# Altium PCB PCB1.PcbDoc
Units mil, origin at the board's own origin, x right, y up, seen from the top; angles counter-clockwise.
Board outline 4140 x 3025 mil, 2 copper layers (Top Layer, Bottom Layer); 30 components, 17 nets, 70 pads, 5 vias.
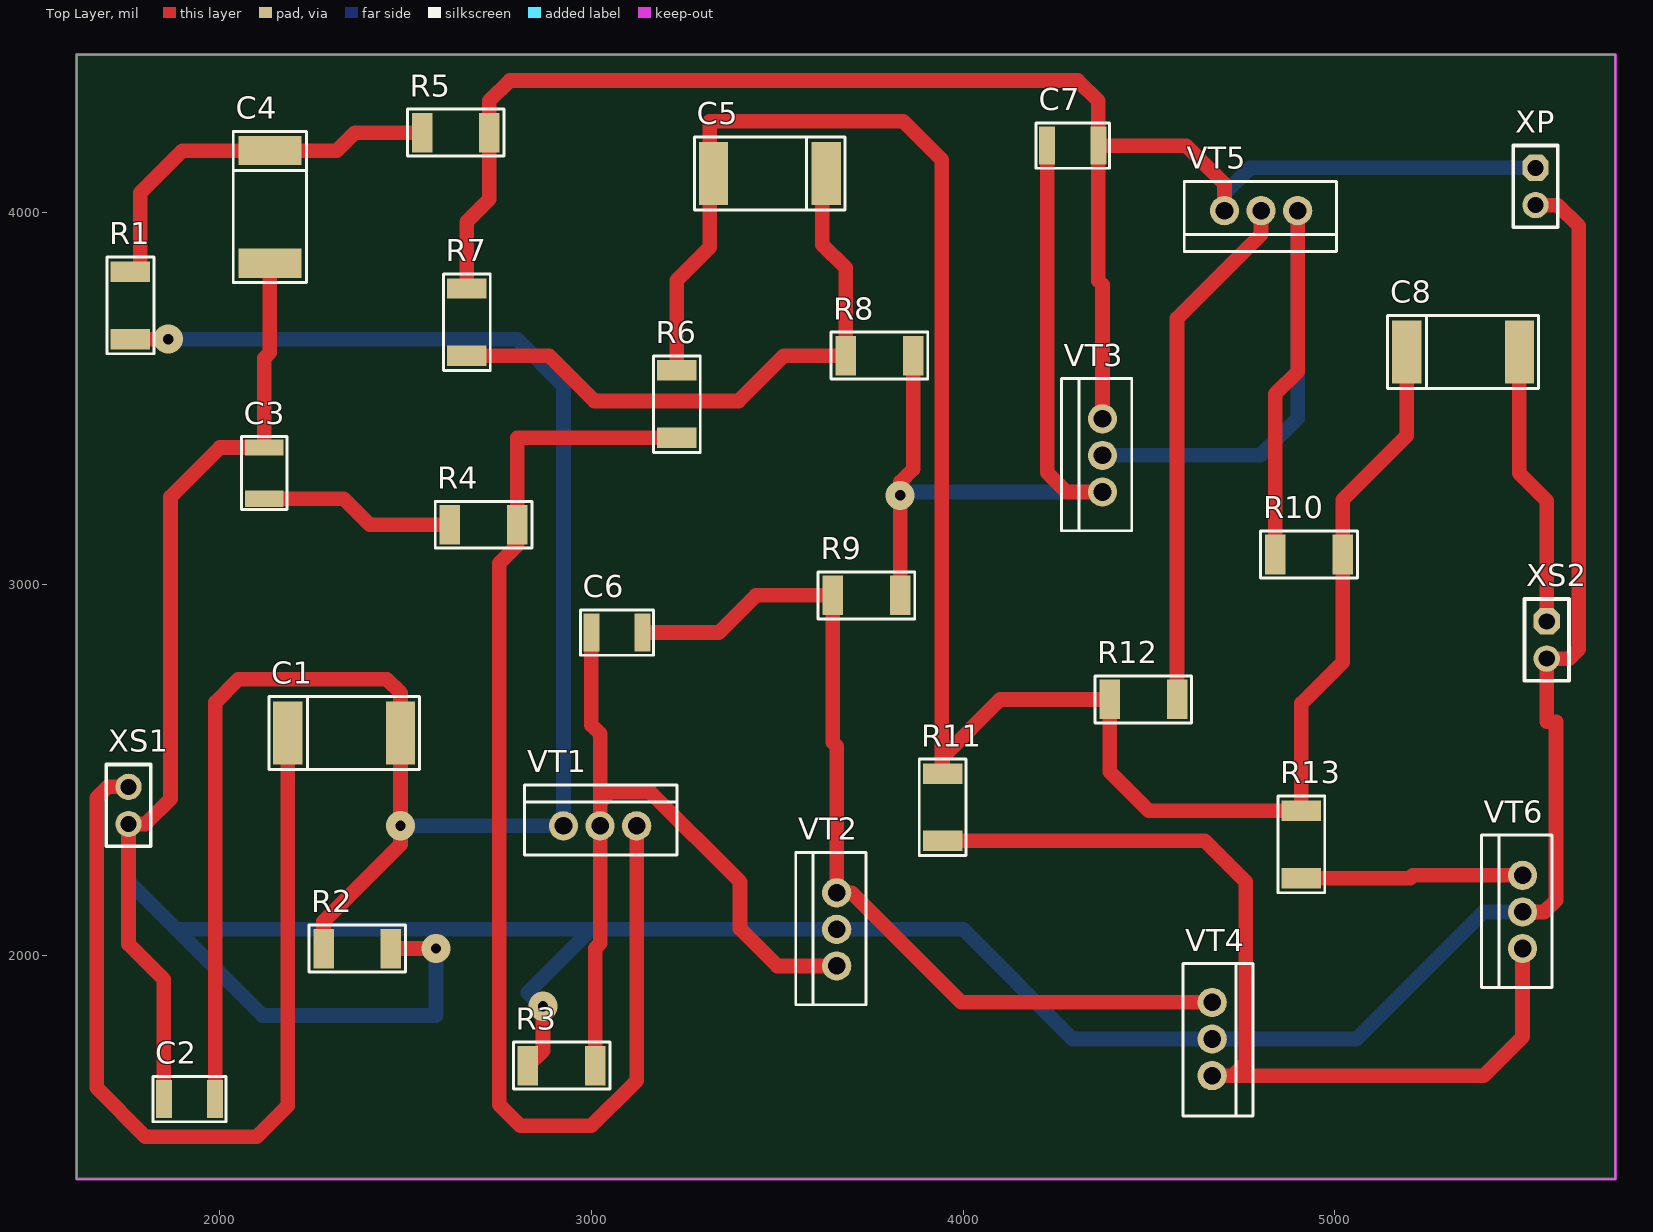
[diagram p0: Top Layer view]
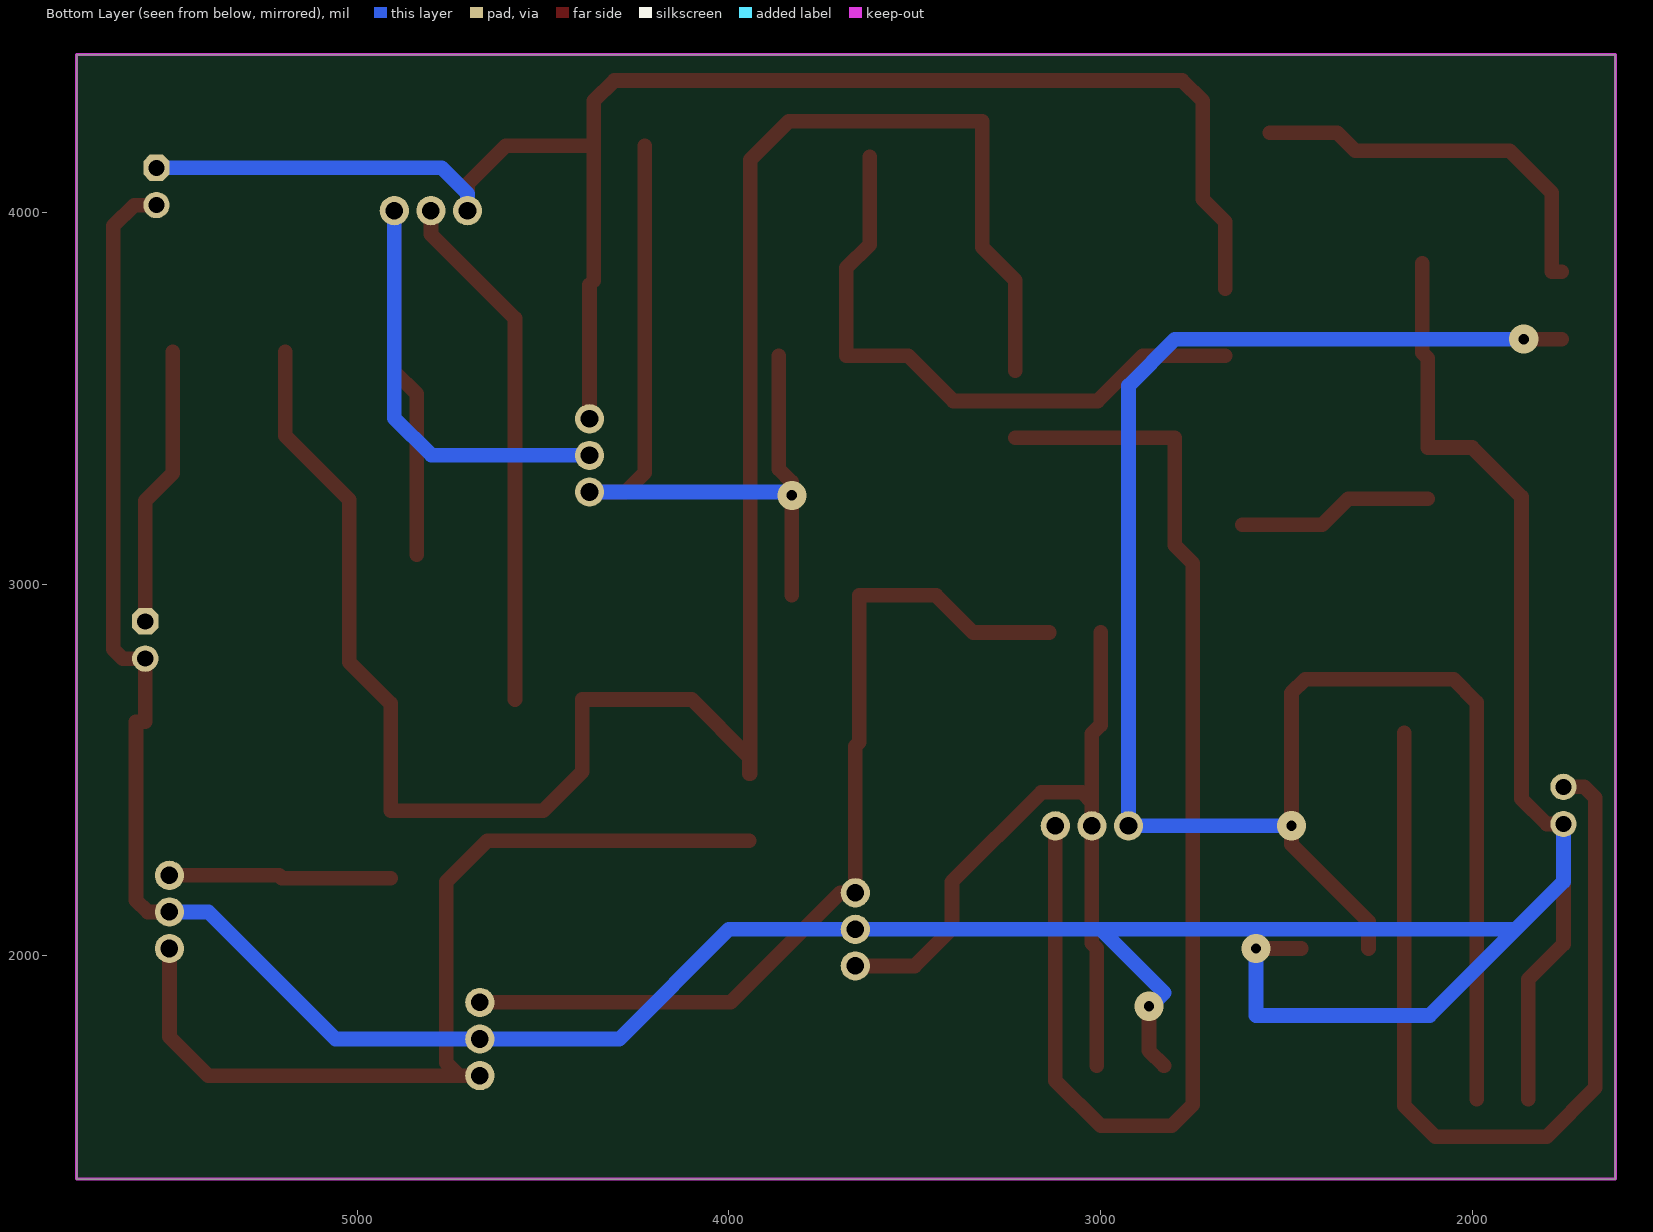
[diagram p1: Bottom Layer view, seen from below]
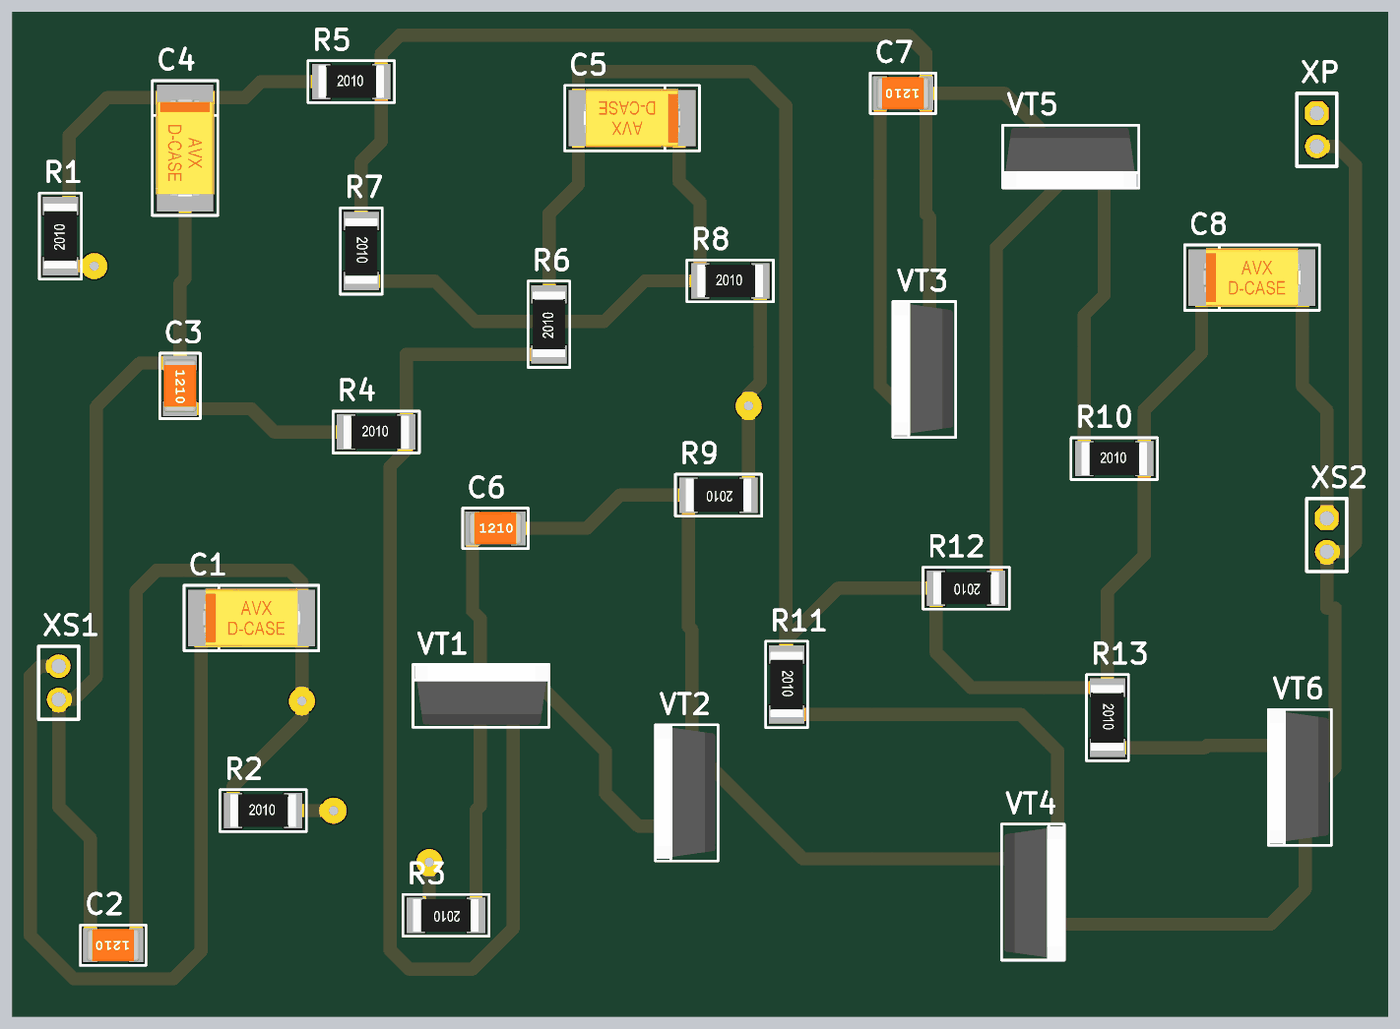
[diagram p2: 3D render of the assembled board from above, using the file's embedded part models]

## Layer stack, top to bottom
Top Solder: solder mask 0.4, Solder Resist, Dk 3.5
Top Layer: signal copper 39.3701
Dielectric 1: dielectric 12.6, FR-4, Dk 4.8
Bottom Layer: signal copper 39.3701
Bottom Solder: solder mask 0.4, Solder Resist, Dk 3.5

## Board outline
1615,1400 1615,4425 5690,4425 5755,4425 5755,1400

## Design rules (kind name [scope] priority, off if disabled: settings)
Clearance Clearance_1 [All] p1: gap=30 ignorepadtopadclearanceinfootprint=FALSE except(0: Arc-Hole Track-Hole SMDPad-Hole THPad-Hole Via-Hole Fill-Hole Poly-Hole Region-Hole Text-Hole)
PolygonConnect [All] p1: connectstyle=Relief reliefconductorwidth=10 reliefentries=4 polygonreliefangle="90 Angle" airgapwidth=10
RoutingVias [All] p1: holewidth=28 width=50 viastyle="Through Hole" minholewidth=28 minwidth=50 maxholewidth=28 maxwidth=50
SolderMaskExpansion [All] p1: expansion=4
Width [All] p1: maxlimit=78.74 minlimit=39.37 preferedwidth=39.37 minimp=50.000000 maximp=50.000000 favimp=50.000000
30 further rules are at their usual default settings.

## Components (designator, comment, footprint, x,y, rotation, side; value= is the part's Value field where it differs from the comment)
C1 "5u" TANTAL_D 2335,2600 r0 top
C2 "1n" CH1210C 1918.9,1615 r180 top
C3 "20u" CH1210C 2120,3298.9 r270 top
C4 "5u" TANTAL_D 2135,4015 r270 top
C5 "20u" TANTAL_D 3480,4105 r180 top
C6 "20" CH1210C 3068.9,2870 r0 top
C7 "200" CH1210C 4295,4180 r180 top
C8 "5u" TANTAL_D 5345,3625 r0 top
R1 "33k" CH2010R 1760,3750 r90 top
R2 "33k" CH2010R 2370,2020 r0 top
R3 "33k" CH2010R 2920,1705 r180 top
R4 "470" CH2010R 2710,3160 r0 top
R5 "18k" CH2010R 2635,4215 r0 top
R6 "3.3k" CH2010R 3230,3484.45 r90 top
R7 "390" CH2010R 2665,3705 r270 top
R8 "2.7k" CH2010R 3775,3615 r0 top
R9 "560" CH2010R 3740,2970 r180 top
R10 "100" CH2010R 4930.55,3080 r0 top
R11 "100" CH2010R 3945,2400 r270 top
R12 "0.22" CH2010R 4485,2690 r180 top
R13 "0.22" CH2010R 4910,2300 r270 top
VT1 "*" TO220_132 3023.43,2350 r0 top
VT2 "*" TO220_132 3660,2071.58 r90 top
VT3 "*" TO220_132 4375,3346.57 r90 top
VT4 "*" TO220_132 4670,1776.57 r270 top
VT5 "*" TO220_132 4801.57,4005 r180 top
VT6 "*" TO220_132 5505,2118.43 r90 top
XP "*" "CON: PBS-2"#1 5540,4070 r270 top
XS1 "*" "CON: PBS-2"#2 1755,2405 r270 top
XS2 "*" "CON: PBS-2"#1 5570,2850 r270 top

## Footprints (in the part's own frame and the unit in brackets; to place one, negate y for a bottom-side part, rotate by r counter-clockwise, add the part's x,y. Pads: shape width x height; smd on the part's side, far side on the other; paste and mask are expansions set on the pad)
CH1210C [mm] "Non polar chip capacitor, size 1210"
  rect 1.1x2.6 smd: 1(-1.75,0) 2(1.75,0)
  silkscreen extent -2.5,-1.55 2.5,1.55, body extent -2,-1.24 2,1.24, height 1.7
CH2010R [mm]
  rect 1.4x2.7 smd: 1(-2.3,0) 2(2.3,0)
  silkscreen extent -3.3,-1.6 3.3,1.6, body extent -2.5,-1.25 2.5,1.25, height 0.6
"CON: PBS-2"#1 [mm] "PBS-2"
  oct 1.8x1.8 hole 1.1: 1(-1.27,0)
  round 1.8 hole 1.1: 2(1.27,0)
  silkscreen extent -2.79,-1.52 2.79,1.52
"CON: PBS-2"#2 [mm] "PBS-2"
  round 1.8 hole 1.1: 1(-1.27,0) 2(1.27,0)
  silkscreen extent -2.79,-1.52 2.79,1.52
TANTAL_D [mm]
  rect 2x4.3 smd: 1(-3.85,0) 2(3.85,0)
  round 0.5 on Mech1: ""(-3.1,1.8)
  silkscreen extent -5.15,-2.5 5.15,2.5, body extent -3.7,-2.22 3.7,2.23, height 3.01
TO220_132 [mm] "Generic TO-220 case, stay variant"
  round 2 hole 1.2: 1(-2.5,0) 2(2.5,0) 3(0,0)
  silkscreen extent -5.15,-2 5.25,2.8, body extent -5,-1.8 5.2,2.7, height 22.06

## Part data
C1 C4 C5 C8: library part TantalCap
C2 C3 C6 C7: library part Capacitor
R1 R2 R3 R4 R5 R6 R7 R8 R9 R10 R11 R12 R13: library part Resistor
VT1 VT4 VT6: library part PNP, "Bipolar"
VT2 VT3 VT5: library part NPN, "Bipolar"
XP XS1 XS2: library part 2-Connector

## Via types
v1: diameter 78.74, hole 28, Top Layer to Bottom Layer, 5 vias

## Nets (pads, with @x,y where several pads share a name; then routed paths per layer and width w, separated by ;. In a path a pad name is that pad's centre, name@x,y a point inside that pad or via, vN(x,y) a via of type N, cw(c..) or ccw(c..) an arc to the next point about the centre after c; other vN are vias at no path point)
GND: C2.2 C3.1 C4.2 R2.2 R3.2 VT2.3 VT4.3 VT6.3 XP.2 XS1.2 XS2.2 | length 10485.9
  Top Layer w39.37: C2.2 1850,1937 1755,2032 XS1.2 1800,2355 1868,2423 1868,3235.8 2000,3367.8 C3.1 2120,3608 2135,3623 C4.2 ; R2.2 v1(2582,2020) ; R3.2 2870,1745.55 v1(2870,1865) ; VT6.3 5563.43,2118.43 5595,2150 5595,2630 5570,2630 XS2.2 5631,2800 5656,2825 5656,3964 5600,4020 XP.2
  Bottom Layer w39.37: XS1.2 1755,2200 1883.42,2071.58 ; v1(2582,2020) 2582,1840 2115,1840 1883.42,2071.58 ; v1(2870,1865) 2865.47,1865 2829.45,1901.02 3000,2071.58 ; VT6.3 5400,2118.43 5058.15,1776.57 VT4.3 4295,1776.57 4000,2071.58 VT2.3 3000,2071.58 ; 1883.42,2071.58 3000,2071.58
NetC1_1: C1.1 XS1.1 | length 2484.2
  Top Layer w39.37: XS1.1 1699,2455 1669,2425 1669,1645 1800,1514 2100,1514 2183.43,1597.43 C1.1
NetC1_2: C1.2 C2.1 R1.1 R2.1 VT1.1 | length 5219.4
  Top Layer w39.37: R1.1 v1(1862,3659.45) ; C2.1 1987.8,2681.8 2050,2744 2450,2744 2486.57,2707.43 C1.2 v1(2486.57,2350) 2486.57,2300 2279.45,2092.87 R2.1
  Bottom Layer w39.37: v1(1862,3659.45) 2800,3659.45 2925,3534.45 VT1.1 v1(2486.57,2350)
NetC3_2: C3.2 R4.1 | length 528.4
  Top Layer w39.37: C3.2 2334,3230 2404,3160 R4.1
NetC4_1: C4.1 R1.2 R5.1 | length 1063.8
  Top Layer w39.37: R1.2 1786,3840.55 1786,4052.57 1900,4166.57 C4.1 2315,4166.57 2363.43,4215 R5.1
NetC5_1: C5.1 R7.2 R8.1 | length 1681.3
  Top Layer w39.37: R7.2 2886.55,3614.45 3008,3493 3396,3493 3518,3615 R8.1 3684.45,3851 3621.57,3913.88 C5.1@3621.57,4150
NetC5_2: C5.2 C8.1 R6.2 R10.2 R11.1 R12.2 R13.1 | length 5690
  Top Layer w39.37: R6.2 3230,3818 3318.43,3906.43 3318.43,4245 3839.33,4245 3943,4141.33 3943,2490.55 R11.1 3945,2535 4100,2690 R12.2 4394.45,2496.1 4500,2390.55 R13.1 4910,2679 5021.1,2790.1 R10.2 5021.1,3227.68 5193.42,3400 C8.1
NetC6_1: C6.1 R3.1 VT1.3 VT2.1 | length 2094.7
  Top Layer w39.37: C6.1 3000,2621.43 3023.43,2598 3023.43,2413.43 ; R3.1 3010.55,2021 3023.43,2033.88 VT1.3 3023.43,2413.43 ; VT2.1 3500,1973.15 3400,2073.15 3400,2199 3159,2440 3050,2440 3023.43,2413.43
NetC6_2: C6.2 R9.2 VT2.2 VT4.1 | length 2489.6
  Top Layer w39.37: C6.2 3343,2870 3443,2970 R9.2 3649.45,2574.55 3660,2564 VT2.2 3700,2170 3995,1875 VT4.1
NetC7_1: C7.1 R5.2 R7.1 VT3.2 VT5.2 XP.1 | length 4437.7
  Top Layer w39.37: R7.1 2665,3975 2725.55,4035.55 R5.2 2725.55,4300 2780.55,4355 4308.9,4355 4363.9,4300 C7.1 ; VT3.2 4375,3806 4363.9,3817.1 C7.1 ; VT5.2 4703.15,4076.85 4600,4180 C7.1
  Bottom Layer w39.37: VT5.2 4703.15,4050 4773.15,4120 XP.1
NetC7_2: C7.2 R8.2 R9.1 VT3.1 | length 2258.1
  Top Layer w39.37: R9.1 v1(3830.55,3239) 3830.55,3275 3865.55,3310 R8.2 ; C7.2 4226.1,3300 4277.95,3248.15 VT3.1
  Bottom Layer w39.37: v1(3830.55,3239) 3839.7,3248.15 VT3.1
NetC8_2: C8.2 XS2.1 | length 755.4
  Top Layer w39.37: C8.2 5496.57,3298.43 5570,3225 XS2.1
NetR4_2: R4.2 R6.1 VT1.2 | length 3372.5
  Top Layer w39.37: VT1.2 3121.85,1664.85 3000,1543 2809,1543 2752,1600 2752,3056 2800.55,3104.55 R4.2 2800.55,3393.9 R6.1
NetR10_1: R10.1 VT3.3 VT5.1 | length 2074.7
  Top Layer w39.37: R10.1 4840,3512 4900,3572 VT5.1
  Bottom Layer w39.37: VT3.3 4800,3346.57 4900,3446.57 VT5.1
NetR11_2: R11.2 VT4.2 VT6.1 | length 2512
  Top Layer w39.37: R11.2 4650.55,2309.45 4760,2200 4760,1713.15 4725,1678.15 ; VT4.2 4725,1678.15 ; VT6.1 5505,1783.15 5400,1678.15 4725,1678.15
NetR12_1: R12.1 VT5.3 | length 1408.6
  Top Layer w39.37: R12.1 4575.55,3715.55 4801.57,3941.57 VT5.3
NetR13_2: R13.2 VT6.2 | length 598.1
  Top Layer w39.37: R13.2 5203,2209.45 5210.4,2216.85 VT6.2
pads on no net: C1. C4. C5. C8.

## Keep-outs
Keep-Out Layer:
  the board outline again, w7.87